# Altium PCB Pole Position.PcbDoc
Units mil, origin at the board's own origin, x right, y up, seen from the top; angles counter-clockwise.
Board outline 1000 x 2495 mil, 2 copper layers (Top Layer, Bottom Layer); 31 components, 68 nets, 162 pads, 17 vias.
Unrouted connection lines stored in the file: 51.
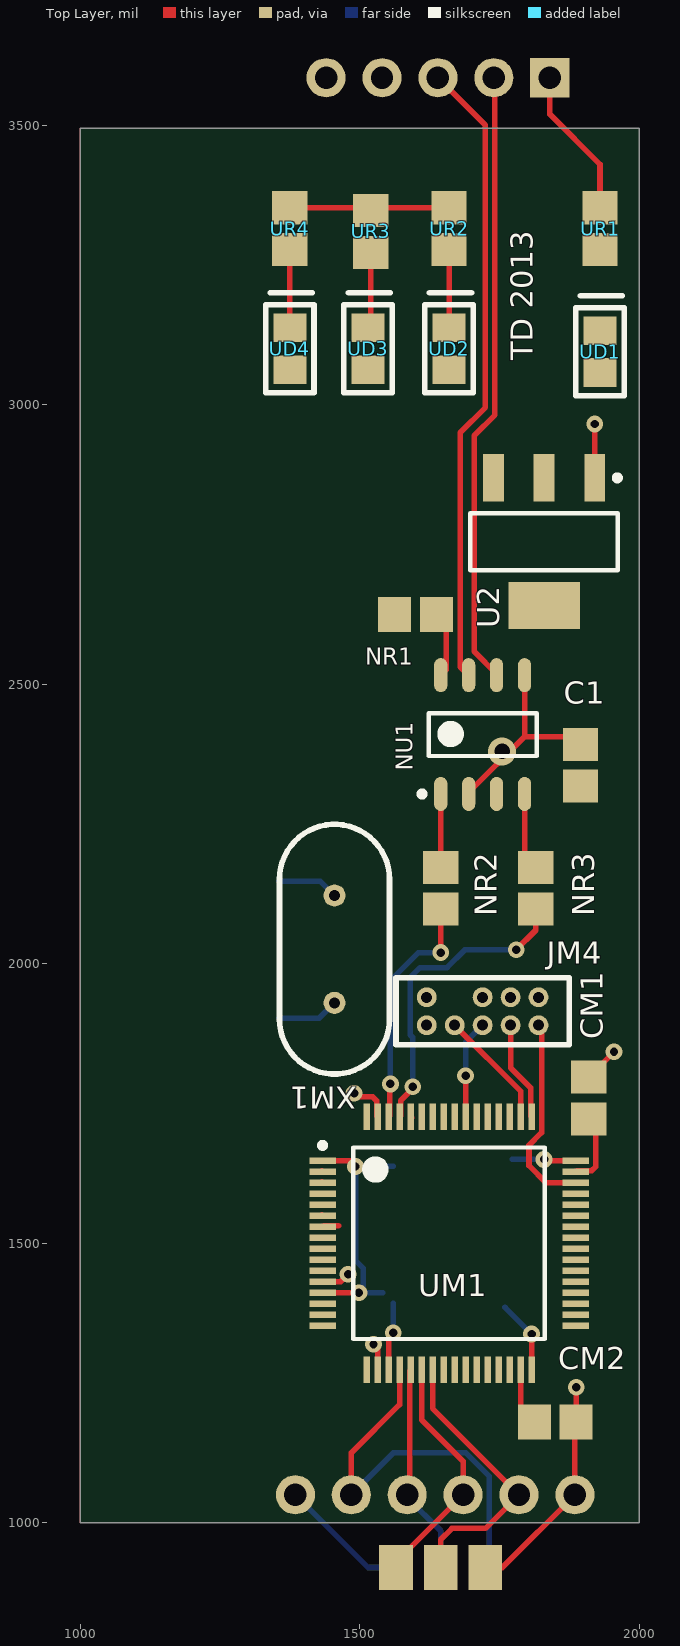
[diagram p0: Top Layer view]
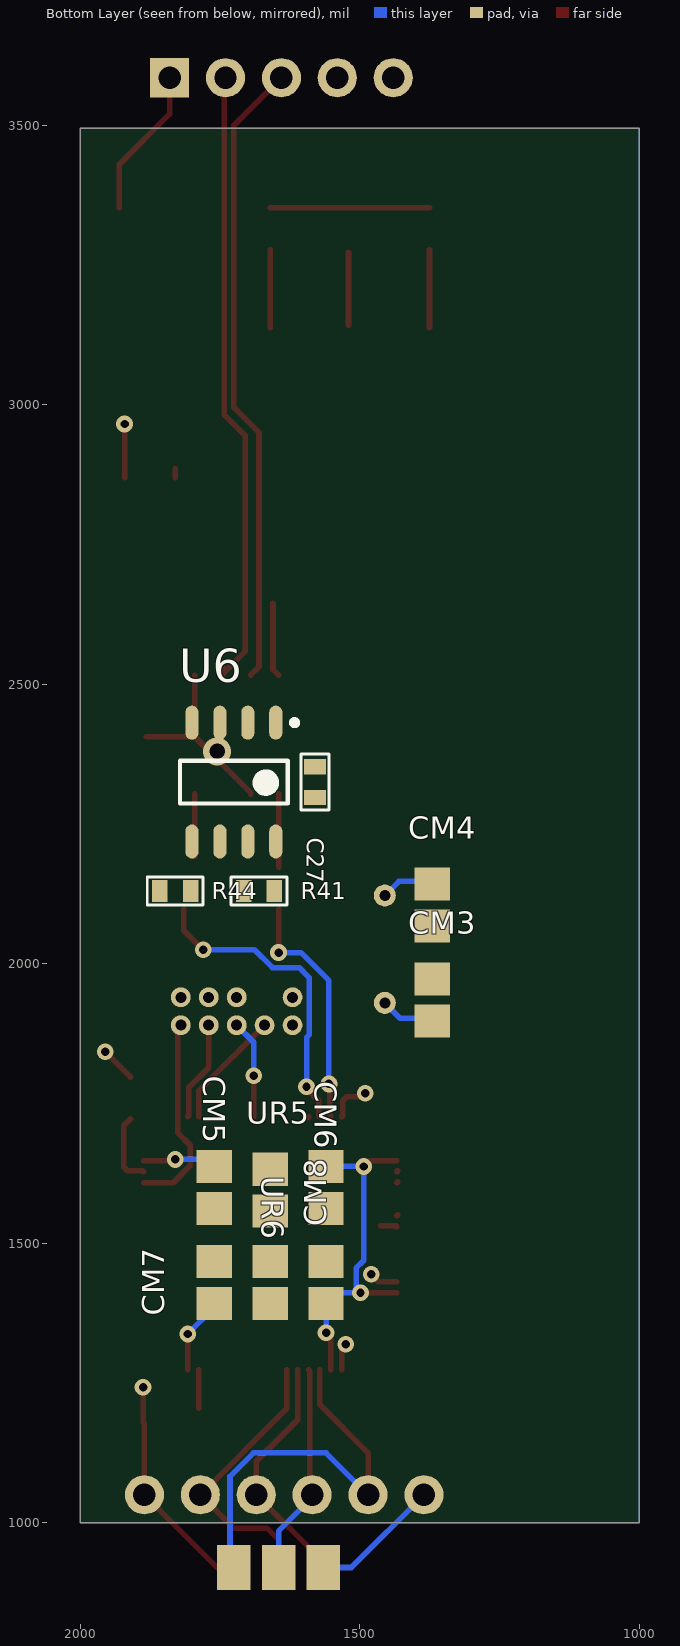
[diagram p1: Bottom Layer view, seen from below]
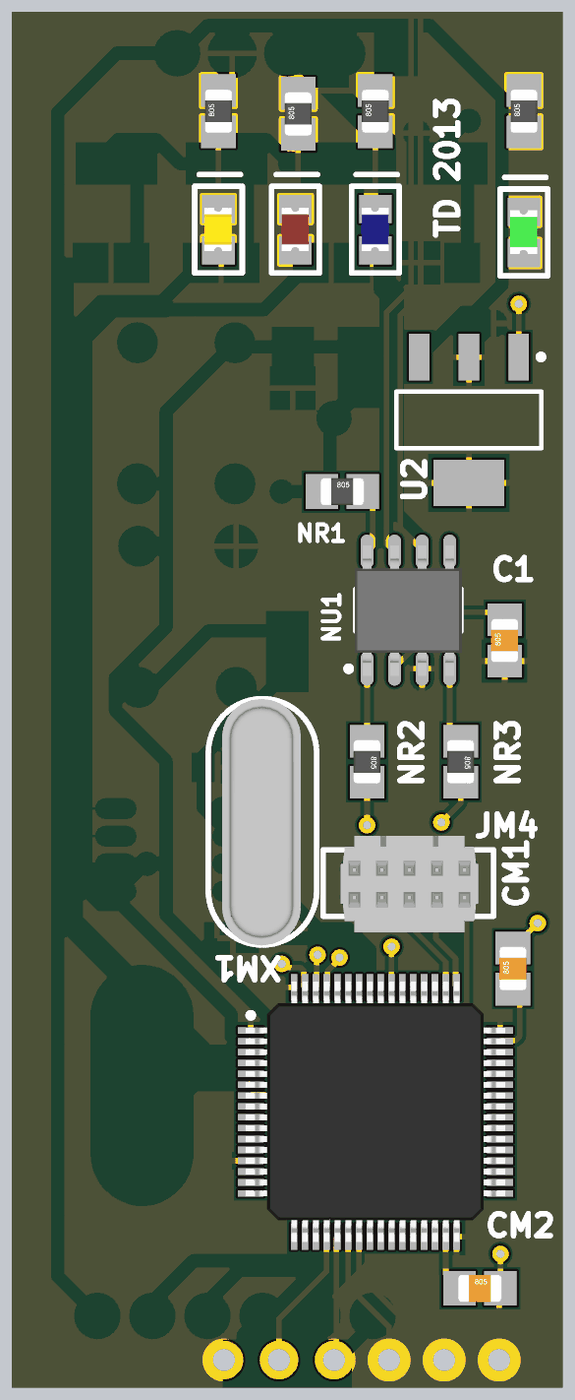
[diagram p2: 3D render of the assembled board from above, using the file's embedded part models]
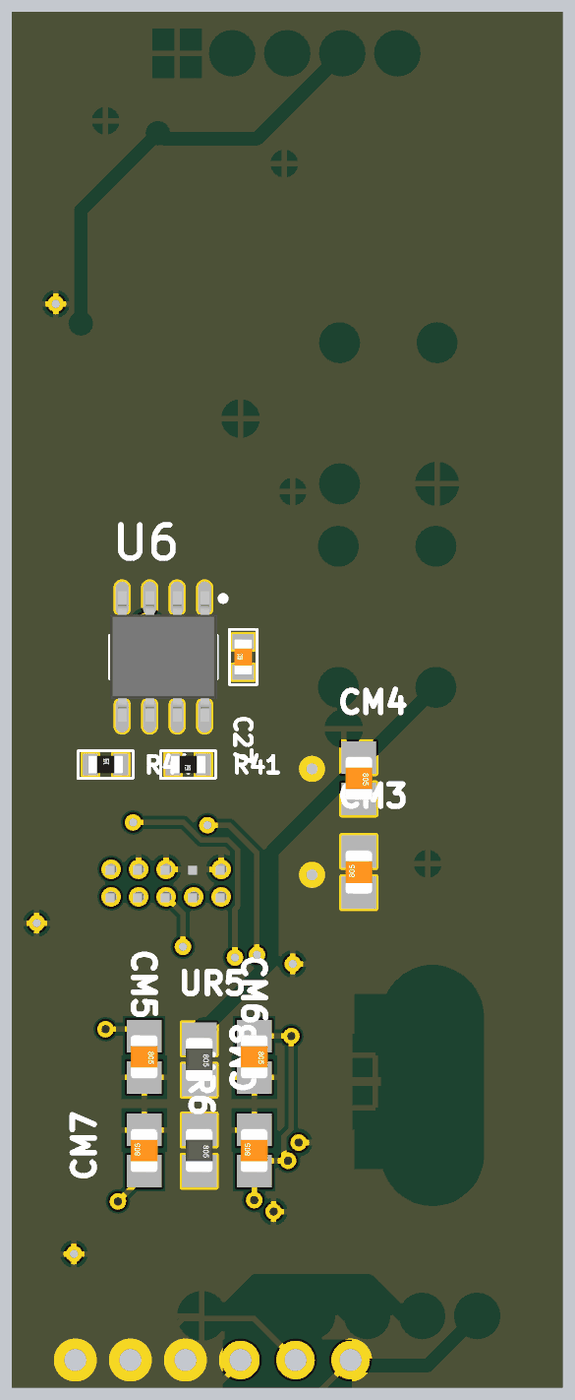
[diagram p3: 3D render of the assembled board from below, using the file's embedded part models]

## Layer stack, top to bottom
Top Layer: signal copper 1.4
Dielectric: dielectric 12.6, FR-4, Dk 4.8
Bottom Layer: signal copper 1.4

## Board outline
1000,1000 1000,3495 2000,3495 2000,1000

## Design rules (kind name [scope] priority, off if disabled: settings)
Clearance [All] p1: gap=7
MinimumSolderMaskSliver [All] p1 off: minsoldermaskwidth=10
PolygonConnect [All] p1: connectstyle=Relief reliefconductorwidth=10 reliefentries=4 polygonreliefangle="90 Angle" airgapwidth=10
RoutingVias [All] p1: holewidth=15 width=30 viastyle="Through Hole" minholewidth=10 minwidth=10 maxholewidth=28 maxwidth=50
SilkToSilkClearance [All] p1 off: silktosilkclearance=10
SilkscreenOverComponentPads [All] p1 off: minsilkscreentomaskgap=10
SolderMaskExpansion [All] p1: expansion=4
Width [All] p1: maxlimit=10 minlimit=10 preferedwidth=10
25 further rules are at their usual default settings.

## Classes and differential pairs
component class "Pole Position": C1 C27 NR1 NR2 NR3 NU1 R41 R44 U2 U6
component class Designator: CM1 CM2 CM3 CM4 CM5 CM6 CM7 CM8 JM4 UD1 UD2 UD3 UD4 UM1 UR1 UR2 UR3 UR4 UR5 UR6 XM1

## Components (designator, comment, footprint, x,y, rotation, side; value= is the part's Value field where it differs from the comment)
C1 "CAP 4.7uF" 0805_Capacitor 1895,2355 r90 top
C27 "CAP 0603" 0603_cap 1580,2325 r90 bottom
CM1 "CAP 2.2 uF" 0805_Capacitor 1910,1760 r90 top
CM2 "CAP 2.2 uF" 0805_Capacitor 1850,1180 r0 top
CM3 "CAP 20PF" 0805_Capacitor 1370,1935 r90 bottom
CM4 "CAP 20PF" 0805_Capacitor 1370,2105 r270 bottom
CM5 "CAP 0.1uF" 0805_Capacitor 1760,1600 r270 bottom
CM6 "CAP 0.1uF" 0805_Capacitor 1560,1600 r270 bottom
CM7 "CAP 0.1uF" 0805_Capacitor 1760,1430 r90 bottom
CM8 "CAP 0.1uF" 0805_Capacitor 1560,1430 r90 bottom
JM4 "J_CORTEX_DEBUG" CORTEX_DEBUG 1820,1940 r180 top
NR1 "R_0805_10k_1%" 0805 1600,2625 r0 top
NR2 "R_0805_22_1%" 0805 1645,2135 r270 top
NR3 "R_0805_22_1%" 0805 1815,2135 r270 top
NU1 "U_SN65HVD233D" SOIC127P600X175-8N 1720,2410 r90 top
R41 "RES 0603" 0603_res 1680,2130 r0 bottom
R44 "RES 0603" 0603_res 1830,2130 r180 bottom
U2 "ZLDO1117G33TA" SOT223-3 1830,2755 r270 top
U6 "MB85RC128PNF-G-JNE1" SOIC127P600X175-8N 1725,2325 r270 bottom
UD1 "D_LED_0805_GREEN" 0805P_Green 1930,3095 r270 top
UD2 "D_LED_0805_BLUE" 0805_BLUE 1660,3100 r270 top
UD3 "D_LED_0805_RED" 0805P_RED 1515,3100 r270 top
UD4 "D_LED_0805_YELLOW" 0805P_YELLOW 1375,3100 r270 top
UM1 "STM32F405RGT6" STM32_LQFP64 1660,1500 r0 top
UR1 "R_0805_1k" 0805_Resistor 1930,3315 r90 top
UR2 "R_0805_1k" 0805_Resistor 1660,3315 r90 top
UR3 "R_0805_1k" 0805_Resistor 1520,3310 r90 top
UR4 "R_0805_1k" 0805_Resistor 1375,3315 r90 top
UR5 "R_0805_100k_1%" 0805_Resistor 1660,1595 r270 bottom
UR6 "R_0805_100k_1%" 0805_Resistor 1660,1430 r270 bottom
XM1 "HC49" HC-49 1455,1930 r90 top

## Footprints (in the part's own frame and the unit in brackets; to place one, negate y for a bottom-side part, rotate by r counter-clockwise, add the part's x,y. Pads: shape width x height; smd on the part's side, far side on the other; paste and mask are expansions set on the pad)
0603_cap [mm]
  rect 0.7x1 smd: 1(-0.7,0) 2(0.7,0)
  silkscreen extent -1.27,-0.64 1.27,0.64, body extent -0.8,-0.4 0.8,0.4, height 0.3
0603_res [mm]
  rect 0.7x1 smd: 1(-0.7,0) 2(0.7,0)
  silkscreen extent -1.27,-0.64 1.27,0.64, body extent -0.8,-0.4 0.8,0.4, height 0.3
0805 [mm] "0805 Resistor/Capacitor"
  rect 1.5x1.6 smd: 1(-0.95,0) 2(0.95,0)
  body extent -1,-0.62 1,0.63, height 0.78
0805_BLUE [mm] "Chip Capacitor; Body 2.0 x 1.2 mm (LxW typ)"
  rect 1.3x1.5 smd: 1(-0.95,0) 2(0.95,0)
  silkscreen extent -2.54,-1.1 2,1.1, body extent -1.02,-0.64 0.99,0.61, height 0.79
0805_Capacitor [mm] "0805 Capacitor"
  rect 1.5x1.6 smd: 1(-0.95,0) 2(0.95,0)
  body extent -1,-0.62 1,0.62, height 0.76
0805_Resistor [mm] "0805 Resistor"
  rect 1.5x1.6 smd: 1(-0.95,0) 2(0.95,0)
  body extent -1,-0.62 1,0.63, height 0.78
0805P_Green [mm] "Chip Capacitor; Body 2.0 x 1.2 mm (LxW typ)"
  rect 1.3x1.5 smd: 1(-0.95,0) 2(0.95,0)
  silkscreen extent -2.54,-1.1 2,1.1, body extent -1.02,-0.64 0.99,0.61, height 0.79
0805P_RED [mm] "Chip Capacitor; Body 2.0 x 1.2 mm (LxW typ)"
  rect 1.3x1.5 smd: 1(-0.95,0) 2(0.95,0)
  silkscreen extent -2.54,-1.1 2,1.1, body extent -1.02,-0.64 0.99,0.61, height 0.79
0805P_YELLOW [mm] "Chip Capacitor; Body 2.0 x 1.2 mm (LxW typ)"
  rect 1.3x1.5 smd: 1(-0.95,0) 2(0.95,0)
  silkscreen extent -2.54,-1.1 2,1.1, body extent -1.02,-0.64 0.99,0.61, height 0.79
CORTEX_DEBUG [mm]
  round 0.9 hole 0.5: 1(0,0) 2(0,1.27) 3(1.27,0) 4(1.27,1.27) 5(2.54,0) 6(2.54,1.27) 8(3.81,1.27) 9(5.08,0) 10(5.08,1.27)
  silkscreen extent -1.4,-0.89 6.48,2.16, body extent -0.69,-1.55 5.66,2.9, height 5.85
HC-49 [mm]
  round 1 hole 0.5: 1(0,0) 2(4.88,0)
  Top Layer pour cut-out: -2.591,1.499 -2.388,1.727 -2.235,1.854 -1.981,2.057 -1.727,2.184 -1.448,2.311 -1.067,2.388 -0.787,2.413 5.766,2.413 6.172,2.337 6.579,2.21 6.909,2.032 7.239,1.778 7.595,1.372 7.849,0.914 7.976,0.533 8.026,0.127 8.026,-0.178 7.95,-0.559 7.772,-0.991 7.569,-1.346 7.188,-1.778 6.858,-2.007 6.375,-2.235 6.02,-2.311 5.588,-2.362 -0.686,-2.362 -1.016,-2.337 -1.27,-2.286 -1.502,-2.216 -1.753,-2.108 -2.007,-1.981 -2.21,-1.829 -2.438,-1.6 -2.642,-1.346 -2.87,-1.016 -2.997,-0.66 -3.073,-0.279 -3.099,0.025 -3.073,0.33 -3.023,0.584 -2.946,0.889 -2.819,1.118 -2.718,1.295
  Bottom Layer pour cut-out: 7.518,1.499 7.315,1.727 7.163,1.854 6.909,2.057 6.655,2.184 6.375,2.311 5.994,2.388 5.715,2.413 -0.838,2.413 -1.245,2.337 -1.651,2.21 -1.981,2.032 -2.311,1.778 -2.667,1.372 -2.921,0.914 -3.048,0.533 -3.099,0.127 -3.099,-0.178 -3.023,-0.559 -2.845,-0.991 -2.642,-1.346 -2.261,-1.778 -1.93,-2.007 -1.448,-2.235 -1.092,-2.311 -0.66,-2.362 5.613,-2.362 5.944,-2.337 6.198,-2.286 6.43,-2.216 6.68,-2.108 6.934,-1.981 7.137,-1.829 7.366,-1.6 7.569,-1.346 7.798,-1.016 7.925,-0.66 8.001,-0.279 8.026,0.025 8.001,0.33 7.95,0.584 7.874,0.889 7.747,1.118 7.645,1.295
  silkscreen extent -3.23,-2.5 8.11,2.5, body extent -3.25,-1.78 8.1,1.87, height 3.3
SOIC127P600X175-8N [mm] "SOIC, 8-Leads, Body 4.9x3.9mm (max), Pitch 1.27mm, IPC Medium Density"
  oval 1.55x0.6 smd: 1(-2.7,1.905) 2(-2.7,0.635) 3(-2.7,-0.635) 4(-2.7,-1.905) 5(2.7,-1.905) 6(2.7,-0.635) 7(2.7,0.635) 8(2.7,1.905)
  silkscreen extent -2.82,-2.45 0.97,2.88, body extent -3.02,-2.46 2.98,2.48, height 1.55
SOT223-3 [mm] "SOT223, 4-Leads, Body 6.7x7.3mm (max), Pitch 2.30mm, IPC Medium Density"
  rect 2.15x0.95 smd: 1(-2.9,2.3) 2(-2.9,0) 3(-2.9,-2.3)
  rect 2.15x3.25 smd: 4(2.9,0)
  silkscreen extent -3.02,-3.35 1.3,3.45, body extent -1.85,-3.35 1.85,3.35, height 1.8
STM32_LQFP64 [mm] "TSQFP, 64-Leads, Body 12.0x12.0mm (max), Pitch 0.50mm, IPC Medium Density"
  rect 1.2x0.3 smd: 1(-5.75,3.75) 2(-5.75,3.25) 3(-5.75,2.75) 4(-5.75,2.25) 5(-5.75,1.75) 6(-5.75,1.25) 7(-5.75,0.75) 8(-5.75,0.25) 9(-5.75,-0.25) 10(-5.75,-0.75) 11(-5.75,-1.25) 12(-5.75,-1.75) 13(-5.75,-2.25) 14(-5.75,-2.75) 15(-5.75,-3.25) 16(-5.75,-3.75) 33(5.75,-3.75) 34(5.75,-3.25) 35(5.75,-2.75) 36(5.75,-2.25) 37(5.75,-1.75) 38(5.75,-1.25) 39(5.75,-0.75) 40(5.75,-0.25) 41(5.75,0.25) 42(5.75,0.75) 43(5.75,1.25) 44(5.75,1.75) 45(5.75,2.25) 46(5.75,2.75) 47(5.75,3.25) 48(5.75,3.75)
  rect 0.3x1.2 smd: 17(-3.75,-5.75) 18(-3.25,-5.75) 19(-2.75,-5.75) 20(-2.25,-5.75) 21(-1.75,-5.75) 22(-1.25,-5.75) 23(-0.75,-5.75) 24(-0.25,-5.75) 25(0.25,-5.75) 26(0.75,-5.75) 27(1.25,-5.75) 28(1.75,-5.75) 29(2.25,-5.75) 30(2.75,-5.75) 31(3.25,-5.75) 32(3.75,-5.75) 49(3.75,5.75) 50(3.25,5.75) 51(2.75,5.75) 52(2.25,5.75) 53(1.75,5.75) 54(1.25,5.75) 55(0.75,5.75) 56(0.25,5.75) 57(-0.25,5.75) 58(-0.75,5.75) 59(-1.25,5.75) 60(-1.75,5.75) 61(-2.25,5.75) 62(-2.75,5.75) 63(-3.25,5.75) 64(-3.75,5.75)
  silkscreen extent -5.87,-4.35 4.35,4.57, body extent -5.99,-6 6.01,6, height 1.6

## Part data
C1: library part C_0805_4.7uF, "CAP CER 4.7UF 50V X5R 10% 0805"
C27: library part C_0603, "CAP CER 0.1UF 25V X7R 0603"
CM1 CM2: library part C_0805_2.2uF, "CAP CERM 2.2 uF"
CM3 CM4: library part C_0805_20PF_100V_5%, "CAP CERM 20PF 5% 100V NP0 0805"
CM5 CM6 CM7 CM8: library part C_0805_0.1uF, "CAP CERM 0.1uF"
JM4: "CORTEX JTAG DEBUG CONNECTOR"
NR1: library part R_0805_10K_1%, "RES 10K OHM 1/8W 1% 0805 SMD"
NR2 NR3: "RES 22 OHM 1/8W 1% 0805 SMD"
NU1: "IC 3.3V CAN TXRX 8-SOIC"
R41 R44: library part R_0603, "RES 5.1K 1% 0603"
U2: library part U_ZLDO1117G33TA, "IC REG LDO 1A 3.3V SOT223-3"
U6: library part U_MB85RC16PNF-G-JNE1, "IC FRAM 128KBIT 400KHZ 8SOP"
UD1: "LED CHIPLED 570NM GREEN 0805 SMD"
UD2: "LED 2X1.2MM 470NM BL WTR CLR SMD"
UD3: "LED CHIPLED 645NM RED DIFF 0805"
UD4: "LED 595NM AMBER DIFF SMD 0805"
UM1: library part U_STM32F405RGT6, "IC MCU 32BIT 1MB FLASH 64LQFP"
UR1 UR2 UR3 UR4: library part R_0805_1K_1%, "RES 1K OHM 1/8W 1% 0805 SMD"
UR5 UR6: "RES 100K OHM 1/8W 1% 0805 SMD"
XM1: library part X_HC49, "CRYSTAL 8.00 MHZ 20PF 49US"

## Free pads (board coordinates)
  round 70 hole 40.16: 2(1385,1050) 2(1440,3585) 2(1485,1050) 2(1540,3585) 2(1585,1050) 2(1640,3585) 2(1685,1050) 2(1740,3585) 2(1785,1050) 2(1885,1050)
  rect 70x70 hole 40.16: 2(1840,3585)
  rect 60x80 smd: 3(1565,920) 3(1645,920) 3(1725,920)
  rect 60x80 smd far side: 3(1565,920) 3(1645,920) 3(1725,920)

## Via types
v1: diameter 30, hole 15, Top Layer to Bottom Layer, 16 vias
v2: diameter 50, hole 28, Top Layer to Bottom Layer, 1 vias

## Nets (pads, with @x,y where several pads share a name; then routed paths per layer and width w, separated by ;. In a path a pad name is that pad's centre, name@x,y a point inside that pad or via, vN(x,y) a via of type N, cw(c..) or ccw(c..) an arc to the next point about the centre after c; other vN are vias at no path point)
+3.3V: C1.1 C27.1 CM5.1 CM6.1 CM7.1 CM8.1 JM4.1 NU1.3 pad.2@1540,3585 R41.1 R44.1 U2.2 U2.4 U6.8 UD1.2 UM1.1 UM1.13 UM1.19 UM1.32 UM1.48 UM1.64 UR6.1 | length 846.5
  Top Layer w10: UM1.13 v1(1498.58,1411.42) ; UM1.1 1482.36,1647.64 v1(1492.6,1637.4) ; UM1.19 1551.73,1331.73 v1(1560,1340) ; UM1.32 v1(1807.64,1337.64) ; v1(1830,1650) 1832.36,1647.64 UM1.48 ; U2.2 U2.2@1830,2885
  Bottom Layer w10: v1(1498.58,1411.42) CM8.1@1541.18,1411.42 ; v1@1506.24,1419.08 1506.24,1455.59 1492.6,1469.23 v1(1492.6,1637.4) CM6.1 ; v1(1560,1340) CM8.1 ; CM7.1@1760,1385.28 v1(1807.64,1337.64) ; CM5.1@1772.6,1650 v1(1830,1650)
+5V: pad.2@1385,1050 pad.2@1440,3585 pad.3@1565,920 U2.3 | length 233.8
  Bottom Layer w10: pad.2@1385,1050 1515,920 pad.3@1565,920
BL_EN: UM1.60 UR5.1 | length 2.5
  Top Layer w10: UM1.60 UM1.60@1592.88,1724.6
CANH: NU1.7 pad.2@1640,3585 | length 1128.8
  Top Layer w10: pad.2@1640,3585 1725,3500 1725,2995 1680,2950 1680,2531.3 NU1.7
CANL: NU1.6 pad.2@1740,3585 | length 1122.7
  Top Layer w10: pad.2@1740,3585 1742,3583 1742,2982 1705,2945 1705,2558.67 NU1.6@1745,2518.67 ; NU1.6 NU1.6@1745,2518.67 ; NU1.6@1745,2540 NU1.6@1745,2518.67
GND: C1.2 C27.2 CM1.2 CM2.2 CM3.2 CM4.2 CM5.2 CM6.2 CM7.2 CM8.2 JM4.3 JM4.5 JM4.9 NR1.1 NU1.2 NU1.5 pad.2@1840,3585 pad.2@1885,1050 pad.3@1725,920 U2.1 U6.4 U6.7 UM1.12 UM1.18 UM1.63 UR1.2 UR2.2 UR3.2 UR4.2 UR5.2 | length 1649.3
  Top Layer w10: UR4.2 UR2.2 ; UM1.12 1465.94,1431.1 v1(1479.24,1444.4) v1@1485,1450.16 ; v1(1490,1768.43) 1496.43,1762 1523.24,1762 1530.27,1754.97 1530.27,1728.16 UM1.63 ; v1@1525,1320 1525,1319.51 v1(1524.73,1319.24) 1532.05,1311.93 UM1.18 ; NU1.2 1695,2306.08 1795,2406.08 ; pad.3@1725,920 1755,920 1885,1050 CM2.2@1885,1177.6 ; NU1.5 1795,2406.08 ; pad.2@1840,3585 1840,3520 1930,3430 UR1.2 ; C1.2@1881.33,2406.08 1795,2406.08 ; CM2.2 v1(1887.4,1242.4) ; CM1.2 v1(1955,1842.4) ; U2.1 v1(1920.55,2965.55)
  Bottom Layer w10: v1(1920.55,2965.55) v1@1925,2970
  other v2: 1755,2380
LED1: UD2.2 UM1.2 | length 2.5
  Top Layer w10: UM1.2@1431.84,1629.73 UM1.2
LED2: UD3.2 UM1.3 | length 2.5
  Top Layer w10: UM1.3@1431.84,1610.05 UM1.3
LED3: UD4.2 UM1.4
MISO: pad.2@1685,1050 pad.3@1565,920 UM1.22 | length 434.1
  Top Layer w10: pad.3@1565,920 1565,930 1685,1050 1685,1110 1610.79,1184.21 UM1.22
MOSI: pad.2@1785,1050 pad.3@1645,920 UM1.23 | length 510.8
  Top Layer w10: UM1.23 1630.47,1204.53 1785,1050 1725,990 1665,990 1645,970 pad.3@1645,920
NetNR1_2: NR1.2 NU1.8 | length 132.8
  Top Layer w10: NU1.8 1655,2526.3 NR1.2@1655,2645
NetNR2_1: NR2.1 NU1.1 | length 131.3
  Top Layer w10: NR2.1 NU1.1
NetNR3_1: NR3.1 NU1.4 | length 111.3
  Top Layer w10: NR3.1@1795,2192.4 NU1.4
NetUD1_1: UD1.1 UR1.1
NetUD2_1: UD2.1 UR2.1 | length 140.2
  Top Layer w10: UD2.1 UR2.1
NetUD3_1: UD3.1 UR3.1 | length 130.2
  Top Layer w10: UD3.1@1520,3142.4 UR3.1
NetUD4_1: UD4.1 UR4.1 | length 140.2
  Top Layer w10: UD4.1 UR4.1
NetUM1_8: UM1.8
NetUM1_9: UM1.9
NetUM1_10: UM1.10
NetUM1_11: UM1.11
NetUM1_14: UM1.14
NetUM1_15: UM1.15
NetUM1_16: UM1.16
NetUM1_17: UM1.17
NetUM1_24: UM1.24
NetUM1_25: UM1.25
NetUM1_26: UM1.26
NetUM1_27: UM1.27
NetUM1_28: UM1.28
NetUM1_29: UM1.29
NetUM1_30: UM1.30
NetUM1_33: UM1.33
NetUM1_34: UM1.34
NetUM1_35: UM1.35
NetUM1_36: UM1.36
NetUM1_37: UM1.37
NetUM1_38: UM1.38
NetUM1_39: UM1.39
NetUM1_40: UM1.40
NetUM1_41: UM1.41
NetUM1_42: UM1.42
NetUM1_43: UM1.43
NetUM1_44: UM1.44
NetUM1_45: UM1.45
NetUM1_51: UM1.51
NetUM1_52: UM1.52
NetUM1_53: UM1.53
NetUM1_54: UM1.54
NetUM1_56: UM1.56
NetUM1_59: UM1.59
NRESET: JM4.10
NRST: UM1.7 UR6.2 | length 29.3
  Top Layer w10: UM1.7 1435.4,1531.31 1462.21,1531.31
OSC1: CM3.1 UM1.5 XM1.1 | length 111.3
  Bottom Layer w10: CM3.1@1355,1902.6 1427.6,1902.6 XM1.1
OSC2: CM4.1 UM1.6 XM1.2 | length 113
  Top Layer w10: UM1.6@1431.84,1550.99 UM1.6
  Bottom Layer w10: CM4.1@1355,2147.4 1429.72,2147.4 XM1.2
RXCAN: NR3.2 UM1.61 | length 558
  Top Layer w10: UM1.61 1573.2,1728.16 1573.2,1754.97 1595,1776.77 v1(1595,1780) ; v1(1780,2025) 1815,2060 NR3.2
  Bottom Layer w10: v1(1595,1780) 1595,1868.26 1590.28,1872.97 1590.28,1975.28 1608,1993 1656.18,1993 1688.18,2025 v1(1780,2025)
SCK: pad.2@1585,1050 pad.3@1645,920 UM1.21 | length 381
  Top Layer w10: pad.2@1585,1050 1589.32,1054.32 1589.32,1271.84 UM1.21
  Bottom Layer w10: pad.2@1585,1050 1585,1045 1645,985 pad.3@1645,920
SCL: R41.2 U6.6 UM1.57
SDA: R44.2 U6.5 UM1.58
SS: pad.2@1485,1050 pad.3@1725,920 UM1.20 | length 720.8
  Top Layer w10: pad.2@1485,1050 1485,1125 1571.42,1211.42 UM1.20
  Bottom Layer w10: pad.2@1485,1050 1560,1125 1690,1125 1732,1083 1732,927 pad.3@1725,920
TCK: JM4.4 UM1.49 | length 179.2
  Top Layer w10: JM4.4 1770,1814.04 1805.86,1778.18 1805.86,1728.16 UM1.49
TDI: JM4.8 UM1.50 | length 212.5
  Top Layer w10: JM4.8 1787.95,1772.05 UM1.50
TDO: JM4.6 UM1.55 | length 176.2
  Top Layer w10: UM1.55 v1(1689.53,1799.53)
  Bottom Layer w10: v1(1689.53,1799.53) 1689.53,1859.53 JM4.6
TMS: JM4.2 UM1.46 | length 358.8
  Top Layer w10: JM4.2 1825.54,1884.46 1825.54,1697.79 1803,1675.24 1803,1638.82 1833.55,1608.27 UM1.46
TXCAN: NR2.2 UM1.62 | length 433.3
  Top Layer w10: UM1.62 1553.51,1728.16 1553.51,1783.51 v1(1555,1785) ; v1(1645,2020) NR2.2
  Bottom Layer w10: v1(1555,1785) 1555,1970 1605,2020 v1(1645,2020)
VCAP_1: CM2.1 UM1.31 | length 69
  Top Layer w10: CM2.1@1787.95,1204.65 UM1.31
VCAP_2: CM1.1 UM1.47 | length 130.1
  Top Layer w10: UM1.47 1888.16,1629.73 1914.97,1629.73 1922,1636.76 1922,1710.6 CM1.1
pads on no net: U6.1 U6.2 U6.3

## Polygon pours and split planes (outlines as drawn)
GND on Bottom Layer "Bottom Layer-No Net" (solid, shelved, pour order 4): 1000,3495 2000,3495 2000,1000 1000,1000
+3.3V on Top Layer "Bottom Layer-No Net" (solid, shelved, pour order 2): 1000,3495 2000,3495 2000,1000 1000,1000

## Silkscreen, mask and mechanical layers (free items; w line width, h text height)
Top Overlay:
  text "TD 2013" at 1810,3080 h40 r90
Mechanical 1:
  lines w10: 1275,870 1275,3645 2000,3645 2000,870 1275,870